# Altium PCB 110-00315-D_B1-DevKit.PcbDoc (part 4 of 9)
Units mil, origin at the board's own origin, x right, y up, seen from the top; angles counter-clockwise.
Board outline 5199.57 x 2702 mil, 8 copper layers (Top Layer, Layer 2-GND-Plane, Layer 3, Layer 4, Layer 5, Layer 6, Layer 7-PWR-Plane, Bottom Layer), stack 60.866 mil thick; 418 components, 298 nets, 1591 pads, 1631 vias.
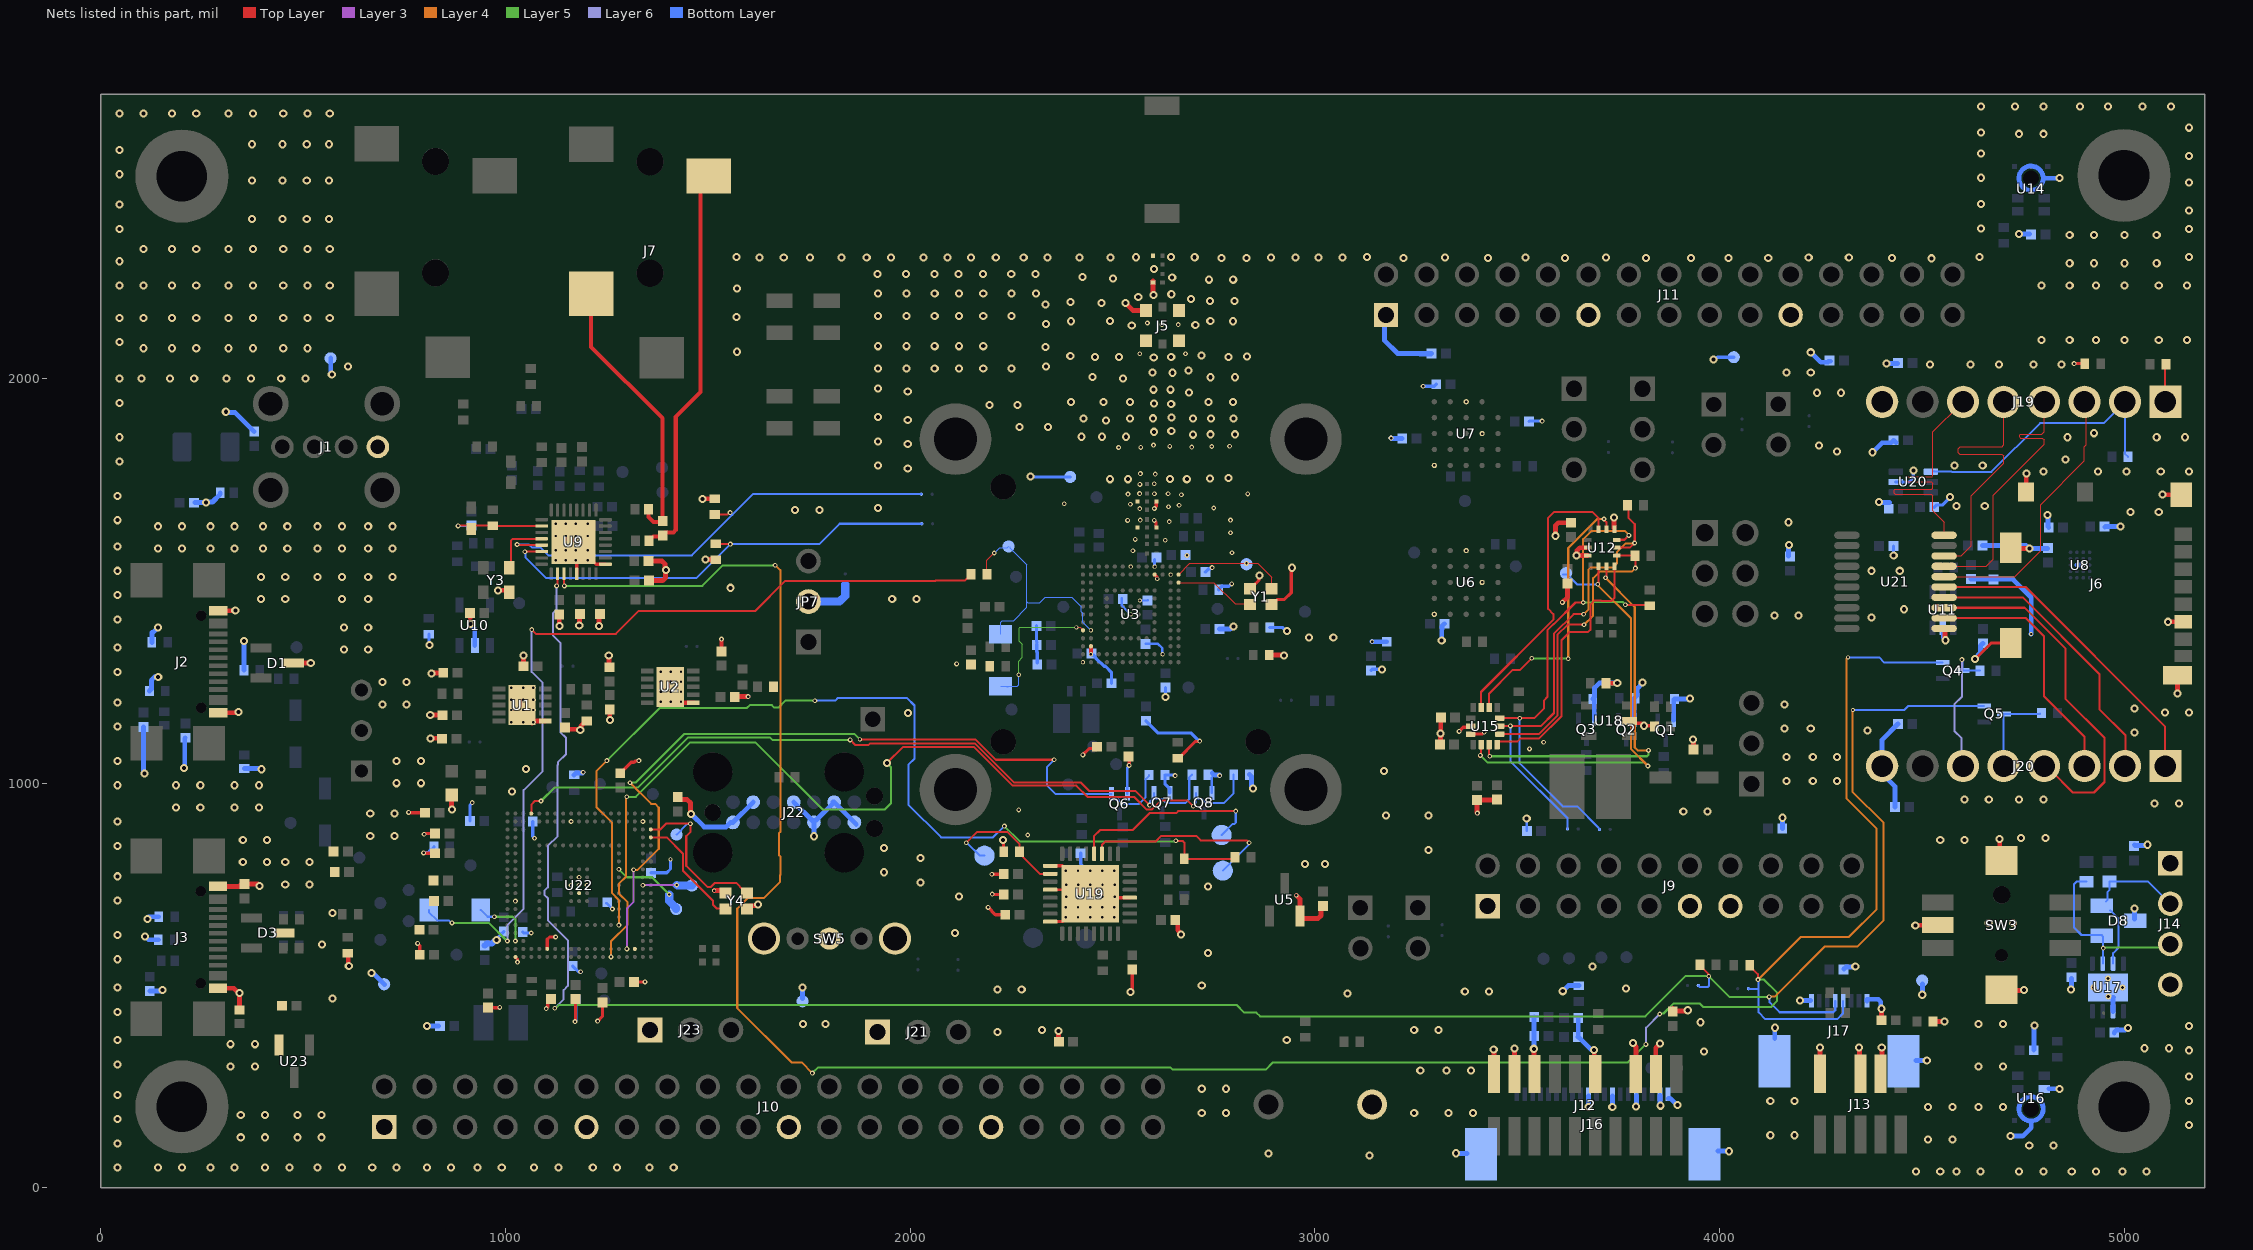
[diagram p9: the nets of this part, all layers, seen from the top]

## Via types
v1: diameter 20, hole 10, Top Layer to Bottom Layer, tented both sides, 773 vias
v2: diameter 12, hole 6, Top Layer to Bottom Layer, tented both sides, 549 vias
v3: diameter 12, hole 6, Top Layer to Bottom Layer, 194 vias
v4: diameter 10, hole 6, Top Layer to Bottom Layer, 101 vias
v5: diameter 10, hole 6, Top Layer to Bottom Layer, tented both sides, 10 vias
v6: diameter 15, hole 8, Top Layer to Bottom Layer, 4 vias

## Nets (pads, with @x,y where several pads share a name; then routed paths per layer and width w, separated by ;. In a path a pad name is that pad's centre, name@x,y a point inside that pad or via, vN(x,y) a via of type N, cw(c..) or ccw(c..) an arc to the next point about the centre after c; other vN are vias at no path point) (continued)
C_TXD_1: R68.1 R102.1 U22.E15 | length 2440.4
  Top Layer w5: v2@2658.58,858.8 2658.58,858.03 2659.81,856.8 2673.58,856.8 2677.26,853.11 R68.1@2677.26,812.8 2798.89,812.8 R102.1@2802.89,816.8
  Layer 5 w5: v2(1250.53,1055.8) 1380.53,1185.8 1596.53,1185.8 1603.53,1192.8 1658.27,1192.8 1664.27,1186.8 1674.53,1186.8 1691.53,1203.8 v2(1764.53,1203.8) ; v2(2232.58,893.8) 2270.58,855.8 2654.58,855.8 v2(2656.58,857.8)
  Layer 4 w5: v2(1250.53,1055.8) 1224.53,1029.8 1224.53,941.13 1262.53,903.13 1262.53,728.8 1280.15,711.18 v3(1280.15,649.3)
  Bottom Layer w5: v2(1764.53,1203.8) 1814.53,1203.8 1821.53,1210.8 1991.53,1210.8 2010.53,1191.8 2010.53,1060.8 1995.53,1045.8 1995.53,946.8 2076.53,865.8 2204.58,865.8 v2(2232.58,893.8)
CANH: D8.2 J14.2 R56.2 U17.7 | length 373.3
  Bottom Layer w5: D8.2@4955.58,707.8 4958.58,710.8 4958.58,730.8 4964,736.22 R56.2@4964,756.77 5059.23,756.77 5112.58,703.43 J14.2@5112.58,699.8 ; D8.2@4965.58,685.8 4966.11,685.8 4969.72,682.19 4969.72,681.65 4986.58,664.8 4986.58,593.8 4972.8,580.02 U17.7@4972.8,554
CANL: D8.1 J14.3 R57.2 U17.6 | length 456.6
  Layer 5 w5: v2(4948.22,592.44) 4949.56,593.78 5117.56,593.78 J14.3@5118.58,594.8
  Bottom Layer w5: R57.2@4907,756.55 4882.33,756.55 4876.58,750.8 4876.58,642.8 4894.58,624.8 D8.1@4945.58,624.8 ; D8.1@4946.58,621.8 4947.21,621.17 U17.6@4947.21,554
CK_ANA_A: J19.1 R75.2 | length 106.5
  Top Layer w5: R75.2@5101.58,2034.8 5101.58,1936.8 J19.1@5107.58,1930.8
CK_CS: J19.3 U21.16 | length 681.8
  Top Layer w3: U21.16@4555,1510.25 4730.04,1510.25 4793.58,1573.8 4793.58,1687.8 4902,1796.22 4902,1831.72 4906.77,1836.49 4906.77,1933.46 4902,1938.22 J19.3@4904.58,1940.8
CK_INT: J20.2 U21.14 | length 719
  Top Layer w5: U21.14@4555,1459.07 4749.3,1459.07 4938.58,1269.8 4938.58,1182.8 5003.58,1117.8 5003.58,1053.8 J20.2@5013.58,1043.8
CK_MISO: J19.5 U21.18 | length 678.2
  Top Layer w3: U21.18@4555,1561.44 4597.22,1561.44 4622.58,1586.8 4622.58,1710.8 4702,1790.22 4702,1808.8 4698,1812.8 4593.58,1812.8 4589.58,1816.8 4589.58,1826.8 4594.58,1831.8 4698.58,1831.8 4701.58,1834.8 ; J19.5@4701.58,1938.8 4702,1938.37 4702,1834.8
CK_MOSI: J19.6 U21.20 | length 677.9
  Top Layer w3: U21.20@4555,1612.62 4555,1645.37 4527.58,1672.8 4527.58,1709.8 4523.58,1713.8 4434.58,1713.8 4431.58,1716.8 4431.58,1723.8 4433.58,1725.8 4524.58,1725.8 4527.58,1728.8 4527.58,1740.8 4523.58,1744.8 4465.58,1744.8 4461.58,1748.8 4461.58,1754.8 4464.58,1757.8 4525.58,1757.8 4527.58,1759.8 4527.58,1867.83 4597.58,1937.83 J19.6@4597.58,1940.8
CK_PWM: J20.1 U21.15 | length 764.4
  Top Layer w5: U21.15@4555,1484.66 4756.71,1484.66 5101.58,1139.8 J20.1@5101.58,1064.8
CK_RST: J19.2 R72.2 U20.4 | length 683.5
  Bottom Layer w5: U20.4@4530,1771 4531,1770 4573.41,1770 4574.11,1769.3 4672.08,1769.3 4792.58,1889.8 4949.55,1889.8 J19.2@5000.56,1940.81 ; J19.2@4998.58,1942.8 J19.2@5000.56,1940.81 ; R72.2@5009.69,1806.25 5002,1813.94 5002,1939.37 J19.2@5000.56,1940.81
CK_RXD: J20.4 U21.13 | length 898.4
  Top Layer w5: U21.13@4555,1433.48 4753.89,1433.48 4855.58,1331.8 4855.58,1207.8 4951.53,1111.84 4951.53,1002.8 4925.53,976.8 4873.53,976.8 4817.53,1032.8 J20.4@4798.53,1032.8
CK_SCK: J19.4 U21.17 | length 678.1
  Top Layer w3: U21.17@4560.58,1533.8 4562.63,1535.84 4659.63,1535.84 4676.58,1552.8 4676.58,1711.8 4802,1837.22 4802,1848.8 4798,1852.8 4743.58,1852.8 ; 4743.34,1852.8 4741.58,1854.55 4741.58,1860.04 4743.34,1861.8 4796.58,1861.8 4801.58,1866.8 ; 4802,1866.8 J19.4@4802,1942.25
CK_SCL: J20.5 Q5.3 R74.2 | length 201.5
  Bottom Layer w5: J20.5@4704.58,1060.8 4702,1063.37 4702,1169.79 Q5.3@4703.15,1170.94 4791.72,1170.94 R74.2@4792.58,1171.8
CK_SDA: J20.6 Q4.3 R73.2 | length 337.2
  Layer 6 w5: v2(4599.22,1305.44) 4599.22,1213.44 4580.58,1194.8 4580.58,1128.8 4598.58,1110.8 4598.58,1064.8 J20.6@4605.58,1057.8
  Bottom Layer w5: v2@4599.58,1305.8 4600.58,1304.8 Q4.3@4600.58,1278.25 4643.44,1278.25 R73.2@4643.89,1277.8
CK_TXD: J20.3 U21.12 | length 620.5
  Top Layer w5: U21.12@4555,1407.89 4757.48,1407.89 4802,1363.37 4802,1214.32 4902,1114.32 4902,1053.32 J20.3@4904.53,1050.8
CLK_CODEC: U9.28 Y3.3 | length 145.3
  Top Layer w5: Y3.3@1006.58,1534.8 1013.58,1541.8 1013.58,1599.8 1017.66,1603.88 U9.28@1089.26,1603.88
CYP_SUSPEND: TP42.1 U19.11 | length 499.9
  Top Layer w5: U19.11@2474.11,825.3 2474.11,848.32 2481.58,855.8 2606.58,855.8 2620.58,869.8 2706.58,869.8 2717.58,858.8 2831.58,858.8 v2(2837.58,852.8)
  Bottom Layer w5: TP42.1@2772.58,783.8 2836.24,847.46 2836.24,854.46 v2@2836.58,854.8
CYP_WAKEUP: TP43.1 U19.12 | length 495.7
  Top Layer w5: U19.12@2454.42,825.3 2454.42,869.49 2469.13,884.2 2549.83,884.2 2591.43,925.8 2657.08,925.8 2662.08,930.8 v2(2804.53,930.8)
  Bottom Layer w5: TP43.1@2769.58,871.8 2797.24,899.46 2801.6,899.46 2804.53,902.39 v2(2804.53,930.8)
CYP_XRESn: R69.1 TP44.1 U19.18 | length 326.7
  Top Layer w5: v2(2138.58,852.8) 2164.58,878.8 2240.58,878.8 2270.26,849.11 R69.1@2270.26,830.8 ; R69.1@2271.58,823.8 2275.3,823.8 2278.59,820.5 2278.59,818 2320.58,776.01 U19.18@2346.08,776.01
  Bottom Layer w5: v2@2138.58,851.8 2141.47,851.8 2172.47,820.8 TP44.1@2183.58,820.8
GND: C1.2 C2.1 C3.1 C4.1 C5.1 C6.1 C7.1 C8.1 C9.1 C10.1 C11.1 C12.1 C13.1 C14.1 C17.1 C18.1 C19.1 C20.1 C21.1 C22.1 C23.2 C24.2 C25.1 C26.1 C27.1 C28.1 C29.1 C30.1 C31.1 C34.2 C39.1 C40.1 C41.2 C42.1 C43.1 C44.1 C45.1 C46.1 C47.1 C48.1 C49.1 C50.1 C51.1 C52.2 C53.1 C54.1 C55.1 C60.1 C61.1 C62.1 C67.1 C68.1 C75.1 C77.1 C78.1 C79.1 C80.1 C81.1 C82.1 C83.1 C84.2 C85.1 C86.2 C87.2 C88.2 C89.2 C90.2 C91.2 C92.2 C93.1 C94.2 C95.1 C96.2 C97.2 C98.2 C99.1 C100.1 C101.2 C102.2 C103.2 C104.1 C105.1 C106.1 C107.1 C108.1 C109.1 C110.1 C111.1 C112.2 C113.1 C114.1 C115.1 C116.1 C117.1 C118.2 C119.1 C120.1 C121.1 C122.1 C123.1 C124.1 C125.1 C126.1 C127.1 C128.1 C129.2 C130.2 C131.1 C132.1 C133.1 C134.1 C135.1 C136.1 C137.1 C138.1 C139.1 C140.1 C141.1 C142.1 C143.1 C144.1 D1.3 D3.3 D6.K D8.3 FB1.2 FB3.1 FB5.1 J1.4 J2.A1/B12 J2.B1/A12 J3.A1/B12 J3.B1/A12 J5.G1 J5.G2 J5.G3 J5.G4 J6.6 J6.10 J6.G1 J6.G2 J6.G3 J6.G4 J9.1 J9.11 J9.13 J10.1 J10.11 J10.21 J10.31 J11.1 J11.11 J11.21 J12.3 J12.5 J12.9 J12.15 J12.17 J12.19 J13.3 J13.5 J13.9 J14.1 J14.4 J16.10 J16.13 J16.16 J16.19 J16.20 J16.21 J16.22 J17.1 J17.8 J17.9 J17.10 J19.8 J20.8 J21.1 J22.2 J22.4 J22.6 J22.8 J22.10 J22.14 J23.1 JP7.2 PD1.1 PD2.1 Q1.2 Q2.2 Q3.2 Q6.2 Q7.2 Q8.2 R2.1 R4.1 R11.1 R13.1 R15.1 R18.2 R19.2 R20.2 R21.2 R24.1 R26.2 R27.1 R28.2 R29.1 R59.1 R60.1 R61.1 R64.2 R69.2 R76.2 R79.1 R81.1 R82.1 R89.2 R90.1 R91.1 R95.1 R97.1 R98.1 S6.2 SH7.2 SW2.2 SW3.5 SW3.SH1 SW3.SH2 SW5.2 SW5.4 SW5.5 TP6.1 TP7.1 TP8.1 TP9.1 TP10.1 TP11.1 U1.6 U1.11 U2.6 U2.11 U3.B2 U3.C12 U3.D1 U3.D2 U3.G1 U3.G7 U3.M11 U3.M12 U3.N13 U5.2 U6.B3 U6.C1 U6.E5 U7.B3 U7.C1 U7.E5 U8.C2 U8.C3 U9.5 U9.9 U9.33 U10.2 U11.2 U12.1 U12.6 U12.7 U14.3 U15.6 U15.7 U16.2 U16.3 U17.2 U17.9 U18.2 U19.4 U19.17 U19.20 U19.24 U19.33 U20.2 U21.11 U22.B2 U22.C18 U22.J10 U22.K9 U22.K10 U22.K11 U22.L2 U22.L10 U22.P18 U22.V12 U22.V19 U23.2 Y1.2 Y1.4 Y3.2 Y4.2 Y4.4 | length 10195.3
  Top Layer w6: U19.20@2346.08,736.64 U19.33@2434.74,736.64
  Top Layer w8: v3(760.53,927.8) 761.53,926.8 C127.1@800.82,926.8 ; v3(782.53,603.8) 787.82,598.51 C138.1@787.82,575.8 ; v3(797.53,827.8) 798.53,826.8 C122.1@825.82,826.8 ; v3(798.53,873.8) 800.53,875.8 C128.1@825.82,875.8 ; C141.1@956.53,445.08 984.82,445.08 v3(985.53,445.8) ; U22.V19@1024.24,570.56 1024.24,570.06 1029.53,564.77 v3(1029.53,557.8) ; v3(1100.53,442.8) 1102.53,444.8 1102.53,445.8 1104.37,447.64 1104.37,458.67 C123.1@1112.58,466.87 ; U22.P18@1102.98,590.24 1102.98,614.2 1108.58,619.8 v3(1123.53,619.8) ; v3(1171.53,410.8) 1172.53,411.8 C121.1@1172.53,466.08 ; v3(1173.58,1550.8) 1175.88,1548.5 U9.5@1175.88,1517.26 ; U9.33@1218.58,1545.8 1223.49,1540.88 U9.9@1246.74,1540.88 ; v3(1227.53,411.8) 1239.53,423.8 C136.1@1239.53,458.08 ; C130.2@1283.53,1024.51 1310.82,1051.8 1317.53,1051.8 1320.53,1054.8 1328.53,1054.8 v3(1329.53,1055.8) ; C126.1@1317.25,508.8 v3(1344.53,508.8) ; v1(1994.58,1173.8) v1@1994.89,1174.11 ; v2(2192.58,692.8) 2210.58,674.8 C109.1@2234.86,674.8 ; v2@2200.58,773.8 v2(2201.78,775) C105.1@2231.29,775 ; v2(2202.58,725.8) 2203.37,725 C104.1@2231.29,725 ; v1(2229.58,859.8) 2230.24,859.14 2230.24,831.45 R69.2@2230.89,830.8 ; U19.24@2346.08,657.9 2375.68,657.9 U19.33@2379.58,661.8 ; U19.17@2346.08,795.69 2375.68,795.69 2434.74,736.64 U19.33@2444.58,726.8 ; v2(2426.58,1069.8) 2442.34,1085.56 2461.61,1085.56 C20.1@2465.85,1089.8 ; U19.33@2508.58,716.8 2508.74,716.95 U19.4@2543.08,716.95 ; C27.1@2539.58,1065.8 2541.08,1064.3 v2(2541.08,1043.8) ; v1(2544.58,483.8) 2548.58,487.8 C108.1@2548.58,539.36 ; v2(2603,1649.2) 2603,1648.12 2607.61,1643.51 2607.61,1632.4 C39.1@2608.61,1631.4 ; v2(2603.4,1678.8) 2603.4,1679.88 2607.81,1684.29 2607.81,1695.41 C40.1@2608.5,1696.1 ; U3.D2@2604,1515.48 2604,1514.81 2610.15,1508.66 2610.15,1505.18 v4(2610.53,1504.8) ; R28.2@2663.73,1061.8 2704.96,1103.03 2714.77,1103.03 v2(2715.53,1103.8) ; Y1.4@2841.53,1487.8 2848.26,1487.8 2861.24,1500.78 2861.24,1511 v1(2863.53,1513.3) ; Y1.2@2893.11,1441.11 2894.09,1441.11 2906.78,1453.8 2924.53,1453.8 2941.43,1470.69 2941.43,1528.9 v1@2940.53,1529.8 ; v2(3356.58,1127.8) 3366.89,1138.11 3382.09,1138.11 U15.6@3384.98,1141 ; U15.7@3384.98,1121.32 3414.1,1121.32 ; U18.2@3777.25,1154 3783.25,1148 3807.37,1148 v1(3813.58,1141.8) ; v1@3808.58,1139.8 3810.58,1141.8 v1(3813.58,1141.8) ; R60.1@3839.63,1140 3837.84,1141.8 v1(3813.58,1141.8) ; v1(4631.58,1306.8) 4671.19,1346.4 J6.G3@4719.39,1346.4 ; v3(4876.53,2036.8) R76.2@4902.85,2036.8
  Top Layer w10: C10.1@1533.58,1325.8 v2(1533.58,1355.8) ; v4(2446.52,1318.63) U3.M11@2446.52,1338.32
  Top Layer w12: J3.B1/A12@289.33,493.02 328.7,493.02 341.53,480.18 v1@341.53,479.8 ; J3.A1/B12@289.33,744.99 341.72,744.99 C13.1@347.53,750.8 ; J2.B1/A12@290.03,1174.02 335.59,1174.02 336.53,1174.96 v1@336.53,1177.8 ; J2.A1/B12@290.03,1425.99 290.19,1426.15 331.87,1426.15 v1(332.03,1426.3) ; FB5.1@342.53,439.5 v1@342.53,481.8 ; C13.1@354.53,750.51 v1@387.82,750.51 ; D1.3@475.53,1296.8 516.53,1296.8 v1@519.53,1299.8 ; v1(612.53,547.8) 611.27,549.06 611.27,576.49 R89.2@612.58,577.8 ; v1@814.41,1168.8 C3.1@840.58,1168.8 ; v1@815.41,1110.8 C6.1@841.58,1110.8 ; v1@817.41,1271.8 C75.1@843.58,1271.8 ; v1@866.58,935.63 D6.K@866.58,961.8 ; v1@912.58,1393.63 C55.1@912.58,1419.8 ; v1@981.41,1476.8 Y3.2@1007.58,1476.8 ; C4.1@1044.58,1288.8 v1@1044.58,1314.96 ; U1.11@1065.58,1148.8 1070.32,1153.54 1098,1153.54 U1.6@1098.09,1153.63 ; v1@1132.58,1388.63 C61.1@1132.58,1414.8 ; C5.1@1145.58,1134.8 1147.05,1133.33 1183,1133.33 v1(1184.53,1131.8) 1186.06,1133.33 1186.06,1140.66 1199.04,1153.63 R2.1@1201,1153.63 ; C60.1@1181.58,1419.8 1182.85,1418.53 1182.85,1390.03 v1(1182.12,1389.3) ; v1@1230.58,1388.63 C62.1@1230.58,1414.8 ; C9.1@1255.58,1288.8 v1@1255.58,1314.96 ; v1@1257.58,1156.63 C12.1@1257.58,1182.8 ; C68.1@1353.3,1548.8 1386.55,1548.8 1393.58,1541.77 1393.58,1531.96 1395.05,1530.49 1395.05,1528.27 v1@1393.58,1526.8 ; C67.1@1354.3,1500.8 1388.55,1500.8 1395.58,1507.83 v1@1395.58,1526.8 ; C129.2@1425.53,965.51 1431.74,959.31 1449.02,959.31 1457,951.33 1457,927.33 v1@1459.53,924.8 ; U2.11@1433.53,1197.8 1434.37,1198.63 U2.6@1464.09,1198.63 ; v1@1487.41,1702.8 R81.1@1513.58,1702.8 ; v1@1494.41,1552.8 R82.1@1520.58,1552.8 ; v4(1515.53,734.3) 1537.14,734.3 Y4.4@1542.96,728.48 ; C11.1@1566.25,1212.8 1567.25,1213.8 v2(1599.53,1213.8) ; Y4.2@1596.11,689.11 1603.89,696.89 1617.54,696.89 1621.24,700.59 v1(1623.4,700.59) ; C80.1@2366.58,360.8 v1@2366.58,386.96 ; U19.33@2444.58,726.8 2497.51,726.8 v3(2505.26,719.05) ; v1(2532.27,2186.13) 2532.48,2186.13 2550.41,2168.2 J5.G4@2583.18,2168.2 ; C41.2@2599.72,2240.8 2599.72,2234.54 2599.97,2234.3 2599.97,2208.13 v1(2601.5,2206.6) ; C107.1@2656.58,663.8 2661.21,659.17 2661.21,636.28 2669.53,627.96 v1(2669.53,625.8) ; R29.1@2887.26,1316.8 2887.76,1316.3 2925.03,1316.3 v1@2926.53,1317.8 ; v4(2954.53,722.8) 2962.93,714.4 U5.2@2962.93,671.8 ; U5.2@2962.53,665.8 3008.3,665.8 3015.33,672.83 3015.33,691.59 C43.1@3020.53,696.8 ; C90.2@3310.58,1095.8 v1@3310.58,1121.96 ; C91.2@3311.29,1162 3311.29,1119.09 v1@3312.58,1117.8 ; v2(3401.53,925.8) 3400.53,926.8 C100.1@3400.53,958.08 3401.17,958.72 3449.89,958.72 C101.2@3450.53,959.36 ; J12.19@3442.58,314.8 v1@3442.58,340.96 ; J12.17@3493.58,317.8 v1@3493.58,343.96 ; J12.15@3541.58,316.8 v1@3541.58,342.96 ; v1(3594.58,1611.3) 3594.58,1636.48 3601.61,1643.51 C84.2@3632.58,1643.51 ; v2(3611.58,1446.8) 3624.58,1459.8 C85.1@3624.58,1493.8 ; v1@3645.58,1566.8 3647.58,1568.8 3647.58,1574.77 3654.61,1581.8 U12.6@3674.65,1581.8 ; v1@3647.41,1562.8 U12.7@3673.58,1562.8 ; J12.9@3690.58,313.8 v1@3690.58,339.96 ; R59.1@3720.58,1246.8 v1@3746.74,1246.8 ; U12.1@3739.58,1629.8 v1@3739.58,1655.96 ; v1(3786.58,357.8) 3786.58,355.63 3793.58,348.63 J12.5@3793.58,320.8 ; J12.3@3842.58,321.8 3842.58,346.07 3852.58,356.07 v1(3852.58,356.8) ; C87.2@3884.58,442.8 3890.11,437.27 3920.05,437.27 v1(3921.58,438.8) ; C97.2@3935.82,1082.8 v1@3935.82,1107.51 ; J13.9@4248.58,319.8 v1@4248.58,345.96 ; J13.5@4345.58,319.8 v1@4345.58,345.96 ; C88.2@4400.58,415.8 v1@4400.58,441.96 ; J13.3@4401.58,319.8 v1@4401.58,345.96 ; v1@4484.41,648.8 SW3.5@4510.58,648.8 ; R64.2@4529.58,410.8 v1@4555.74,410.8 ; v1@4557.58,1353.63 U21.11@4557.58,1379.8 ; SW3.SH2@4692.58,834.8 v1@4692.58,860.96 ; J6.G4@4719.39,1581.44 4720.61,1580.23 v1(4766.24,1580.23) ; SW3.SH1@4725.58,487.8 v1@4751.74,487.8 ; J6.10@4758.27,1720.34 v1(4758.27,1765.01) ; v1(5095.03,1712.84) J6.G1@5139.55,1712.84 ; v1(5108.58,1398.8) 5108.66,1398.88 5143.73,1398.88 J6.6@5143.82,1398.8 ; v1(5131.58,1221.8) 5131.58,1266.47 J6.G2@5131.79,1266.68
  Bottom Layer w6: C131.1@1249.11,703.61 v3@1263.58,689.14 ; C26.1@2522.72,1456.8 2522.72,1439.29 v4(2544.95,1417.06) ; Q6.2@2536.69,973.58 2536.69,1037.78 2541.08,1042.17 v2(2541.08,1043.8) ; v4(2567.58,1451.3) 2586.36,1451.3 C22.1@2586.58,1451.51 ; C25.1@2581.58,1344.08 2612.3,1344.08 2622.74,1333.63 2622.74,1319.58 v4(2623.69,1318.63) ; R97.1@2744.58,1013.8 2745.69,1012.69 Q8.2@2745.69,975.58 ; v1(3523.58,912.3) 3523.58,882.08 C77.1@3523.86,881.8
  Bottom Layer w8: v3(797.53,827.8) 798.3,828.56 808.61,828.56 814.05,834 816.02,834 822.85,840.83 R90.1@822.85,842.8 ; S6.2@810.53,1368.11 810.53,1342.8 v1(811.53,1341.8) ; C134.1@911.82,906.8 911.82,945 917.53,950.71 v2(917.53,951.8) ; v1@979.53,611.8 980.42,612.68 980.42,617.97 C125.1@995.53,633.08 ; C119.1@1042.58,632.08 1045.08,629.58 v3(1063.58,629.58) ; C133.1@1067.25,904.8 1067.25,868.08 v3(1071.53,863.8) ; C137.1@1166,548 1180.21,533.8 v3(1185.53,533.8) ; v3@1172.53,411.8 1172.3,412.03 1172.3,412.64 1173.53,413.88 C135.1@1173.53,465.08 ; C132.1@1359.53,778.36 1398.1,778.36 1407.53,787.8 v5(1407.53,811.8) ; v1(2297.2,1758) 2298.4,1756.8 TP8.1@2395.3,1756.8 ; C28.1@2311.86,1388.8 2311.86,1348.51 C21.1@2313.58,1346.8 ; 2312.86,1324.08 C21.1@2312.86,1341.8 ; C34.2@2313.86,1297.8 2313.86,1324.08 ; C106.1@2421.3,826.8 2421.3,799.97 2426.95,794.31 2432.98,794.31 2443.5,783.8 v3(2444.58,783.8) ; C17.1@2452.58,1315.8 2453.3,1315.8 2459,1310.09 2459,1308.86 2479.07,1288.8 2482.58,1288.8 2497.3,1274.08 C19.1@2497.3,1246.8 ; v4@2544.57,1535.55 v4(2544.95,1535.17) ; C31.1@2582.53,1154.08 2612.82,1123.8 2694.53,1123.8 v2@2713.53,1104.8 ; v4(2604,1535.17) C86.2@2604,1553 ; v1(2630.58,1212.8) C30.1@2630.58,1236.08 ; Q7.2@2641.69,975.58 2641.69,986.53 2629.58,998.64 2629.58,1019.89 R95.1@2629.69,1020 2653.37,1020 v2(2654.58,1018.8) ; C23.2@2729.32,1521.6 2737.52,1529.8 2742.22,1529.8 2744.92,1532.5 v2(2746,1532.5) ; R79.1@2762.68,1477.6 2762.68,1479.57 2769.51,1486.4 2787.79,1486.4 2793,1491.6 v2@2794.8,1491.6 ; v1@2862.45,1514.38 v1(2863.53,1513.3) ; R27.1@2888.26,1384.8 2919.33,1384.8 2929.33,1374.8 v1@2932.58,1374.8 ; C46.1@3138.58,1278.08 3141.8,1281.3 v1(3165.58,1281.3) ; v3(3267.53,1980.8) 3294.82,1980.8 C45.1@3299.89,1985.88 ; C48.1@3529.33,1893.88 3530.33,1894.88 v3(3561.61,1894.88) ; v1(3985.53,2046.8) 3988.78,2046.8 3994.78,2052.8 TP6.1@4035.53,2052.8 ; C117.1@4429.72,1586.25 4429.72,1563.66 v1(4430.58,1562.8) ; U20.2@4435.7,1744.25 4469.25,1744.25 4479,1754 v1@4479,1776 ; C112.2@4530.72,1682 4535.95,1687.24 4550.23,1687.24 v1(4570,1707)
  Bottom Layer w10: v3(1181.69,747.69) v3@1181.69,748.23
  Bottom Layer w12: v1@105.53,1026.8 C7.1@105.53,1139.08 ; 117.53,612.8 R21.2@141.85,612.8 ; v1@117.53,669.8 R20.2@142.85,669.8 ; R19.2@119.85,1227.8 124.67,1232.62 124.67,1253.94 v1@134.53,1263.8 ; C14.1@120.53,486.08 v1@147.82,486.08 ; R18.2@125.85,1347.8 125.85,1372.11 127.85,1372.11 v1@143.53,1387.8 ; v1@208.53,1036.8 207.03,1038.3 207.03,1110.58 C8.1@208.53,1112.08 ; C1.2@232.58,1693.8 v1@258.74,1693.8 ; v1@261.53,1693.8 262.52,1694.78 275.63,1694.78 294.85,1714 FB1.2@294.85,1717.8 ; v1@308.53,1915.8 331.93,1915.8 C2.1@379,1868.72 ; R26.2@353.32,1279 353.43,1279.11 353.43,1350.69 v1(353.53,1350.8) ; FB3.1@354.53,1036.1 v1@395.26,1036.06 ; TP10.1@567.8,2050.8 567.8,2014.69 570.53,2011.96 v1(570.53,2009.8) ; v1(668.58,530.8) 670.11,529.27 674.11,529.27 TP11.1@700.58,502.8 ; v1(805.53,399.8) C79.1@834.24,399.8 ; v1@910.58,1391.8 912.25,1391.8 923.96,1380.08 U10.2@923.96,1339.77 ; R91.1@1169.53,1020.48 1174.36,1025.31 1190.04,1025.31 v2(1191.53,1026.8) ; v1@1457.53,924.8 v1(1458.53,923.8) 1490.53,891.8 1544.85,891.8 1556.05,903 J22.14@1562,903 J22.2@1612,953 ; J22.4@1712,953 1757.21,907.8 J22.10@1766.53,907.8 ; TP9.1@1733.58,467.8 v1@1733.58,493.96 ; JP7.2@1747.53,1450.8 JP7.2@1749.53,1448.8 ; J22.10@1762,903 1762.27,902.74 1762.27,869.06 v1(1762.53,868.8) ; J22.10@1766.67,907.66 1809.53,950.53 J22.6@1809.53,953 ; J22.6@1812,953 J22.8@1862,903 1866.53,898.47 J22.8@1866.53,897.8 ; 2746.58,1024.8 2751.48,1019.9 v2@2764.58,1019.9 ; C18.1@2764.53,1380.8 2790.37,1380.8 2795.37,1385.8 v1@2797.53,1385.8 ; R98.1@2838.69,1021 2843.52,1016.18 2843.52,992.98 2847.53,988.96 v1(2847.53,986.8) ; v4(3141.53,1349.8) 3141.82,1349.51 C44.1@3177.58,1349.51 ; J11.1@3172.53,2162.8 3172.53,2093.8 3204.53,2061.8 C81.1@3288.53,2061.8 ; v2(3188.53,1852.8) 3189.45,1851.88 C49.1@3215.89,1851.88 ; 3259.53,2060.8 C81.1@3287.58,2060.8 ; v1(3313.53,1352.8) 3313.53,1380.56 3314.04,1381.07 3314.04,1387.59 C47.1@3320.25,1393.8 ; v1@3349.41,84.8 J16.22@3375.58,84.8 ; C99.1@3542.29,422 3541.66,421.38 3541.66,345.71 v1@3542.58,344.8 ; v1(3612.58,485.8) 3626.26,499.48 R61.1@3652.58,499.48 ; C98.2@3650.72,373 3681.69,342.04 3686.34,342.04 3689.58,338.8 v1@3689.58,337.8 ; C98.2@3650.86,378.51 3650.86,419.86 C96.2@3651,420 ; v1@3676.58,200.63 J16.10@3676.58,226.8 ; R15.1@3686.69,1208 3691.52,1212.83 3691.52,1235.73 3703.12,1247.34 v1(3747.29,1247.34) 3749.04,1247.34 v1@3750.58,1245.8 ; R15.1@3690.59,1207.78 3690.59,1157.67 Q3.2@3690.69,1157.58 ; v1@3735.58,200.63 J16.13@3735.58,226.8 ; Q2.2@3789.37,1156 3789.37,1210 3789.72,1210 3796.52,1216.8 3796.52,1233.57 3809.58,1246.63 v1(3809.58,1248.8) ; v1@3794.58,201.63 J16.16@3794.58,227.8 ; J16.19@3853.28,227.8 3853.28,203.6 v1(3854.08,202.8) ; J16.20@3873.58,220.8 3878.41,220.8 3894.41,204.8 v1(3896.58,204.8) ; Q1.2@3886.69,1155.58 3886.78,1155.67 R11.1@3886.78,1207 ; R11.1@3888.69,1208 3926.78,1208 v1(3927.58,1208.8) ; J16.21@3996.58,90.8 v1@4022.74,90.8 ; J17.10@4136.58,368.8 v1@4136.58,394.96 ; C78.1@4155.58,887.8 v1@4155.58,913.96 ; C110.1@4170.74,1561.63 v1@4170.74,1587.8 ; v1@4199.41,462.8 J17.1@4225.58,462.8 ; v1(4225.53,2064.8) 4250.15,2040.18 C82.1@4267.88,2040.18 ; C82.1@4269.82,2042.8 C82.1@4274.58,2042.8 ; C103.2@4307.58,540.8 4311.99,545.21 4331.82,545.21 4333.41,546.8 v1(4335.58,546.8) ; J17.8@4364.8,462 4364.8,465.8 4392.55,465.8 4398.51,459.84 4398.51,445.87 v1@4399.58,444.8 ; v1(4378.53,1817.8) 4401.78,1841.05 4424.08,1841.05 C114.1@4430.29,1847.25 C114.1@4436.49,1841.05 ; v1@4394.41,1693.8 4420.58,1693.8 ; J20.8@4411.58,1054.8 4402,1064.37 4402,1107.25 C115.1@4441,1146.25 ; J20.8@4412.58,1038.8 4412.58,1013.35 4433.58,992.35 C116.1@4433.58,940.8 ; v1@4413.41,2036.8 C113.1@4439.58,2036.8 ; J17.9@4485.58,314.8 v1@4511.74,314.8 ; v1@4501.58,477.63 TP7.1@4501.58,503.8 ; U11.2@4552,1383.75 4554,1381.75 4554,1359.37 4558.12,1355.25 v1(4558.12,1353.09) ; C53.1@4621.53,1504.08 4725.25,1504.08 4770.53,1458.8 4770.53,1368.97 v4(4770.1,1368.54) ; v1(4631.58,1306.8) 4631.58,1308.96 4644.8,1322.18 4644.8,1339.08 C83.1@4651,1345.29 ; C118.2@4649.72,1587.25 4757.04,1587.25 4764.07,1580.23 v1(4766.24,1580.23) C54.1@4810.91,1580.23 ; v1(4719.58,127.8) 4749.41,127.8 4770.41,148.8 4770.41,165 U16.3@4770.41,165.47 ; v1@4740.41,2356.8 C89.2@4766.58,2356.8 ; C92.2@4776.58,340.8 4777.65,341.87 4777.65,399.87 v1(4778.58,400.8) ; 4800,2495 4838.33,2495 v1@4838.53,2494.8 ; v1@4810.22,1663.16 v1(4810.58,1662.8) v1@4811.72,1661.66 ; v1@4810.53,1663.8 4812.11,1662.22 4812.11,1633.5 C52.2@4813.82,1631.8 ; U16.2@4813.58,244.8 v1@4839.74,244.8 ; v1@4869.58,490.63 C93.1@4869.58,516.8 ; U8.C3@4883.26,1539 v2(4899,1539) ; C51.1@4952.21,1632.9 4953.21,1633.9 4990.48,1633.9 v1(4990.58,1633.8) ; U17.2@4972.8,436 4972.8,470.02 U17.9@4973.58,470.8 ; C94.2@4975.58,381.8 4975.58,383.86 C94.2@4975.72,384 4981.93,390.21 5002.78,390.21 5007.37,394.8 v1(5009.53,394.8) ; D8.3@5025.58,663.8 v1@5025.58,689.96 ; C95.1@5025.58,847.8 5027.11,846.27 5056.05,846.27 v1(5057.58,847.8)
  Bottom Layer w15: C124.1@948.58,598.51 953.28,603.22 966,603.22 v1@973.58,610.8
  Bottom Layer w20: JP7.2@1749.53,1448.8 1825.53,1448.8 1839.53,1462.8 SH7.2@1839.53,1490.5
  other v1: 4485.53,39.8 4545.53,39.8 4585.53,39.8 4645.53,39.8 4740.53,39.8 4800.53,39.8 4870.53,39.8 4930.53,39.8 4995.53,39.8 5055.53,39.8 40.53,49.8 140.53,49.8 200.53,49.8 270.53,49.8 330.53,49.8 405.53,49.8 465.53,49.8 535.53,49.8 595.53,49.8 670.53,49.8 730.53,49.8 805.53,49.8 865.53,49.8 930.53,49.8 990.53,49.8 1070.53,49.8 1130.53,49.8 1215.53,49.8 1275.53,49.8 1355.53,49.8 1415.53,49.8 3135.53,79.8 2885.53,84.8 3348.87,85.34 4023.29,90.25 4765.53,104.8 4825.53,104.8 40.53,109.8 4515.53,119.8 4575.53,119.8 345.53,124.8 405.53,124.8 485.53,124.8 545.53,124.8 4125.53,129.8 4185.53,129.8 5160.53,154.8 40.53,169.8 345.53,179.8 405.53,179.8 485.53,179.8 545.53,179.8 2720.53,184.8 2780.53,184.8 3245.53,184.8 3330.53,184.8 3390.53,184.8 3676.04,200.09 3735.04,200.09 4515.53,199.8 4575.53,199.8 4640.53,199.8 4700.53,199.8 3794.04,201.09 4125.53,214.8 4185.53,214.8 5160.53,214.8 40.53,229.8 4840.29,244.25 2720.53,244.8 2780.53,244.8 5160.53,274.8 3260.53,289.8 3325.53,289.8 3385.53,289.8 320.53,299.8 380.53,299.8 4640.53,299.8 4700.53,299.8 40.53,304.8 4512.29,314.25 3962.1,337.14 5160.53,339.8 3690.04,340.51 3442.04,341.51 3541.04,343.51 3493.04,344.51 5050.53,344.8 5110.53,344.8 4248.04,346.51 4345.04,346.51 4401.04,346.51 320.53,354.8 380.53,354.8 40.53,364.8 2930.53,364.8 2215.53,384.8 2366.04,387.51 2325.53,389.8 3245.53,389.8 3305.53,389.8 4137.12,395.51 5160.53,399.8 1735.53,404.8 1790.53,404.8 4640.53,404.8 4700.53,404.8 3953.1,409.14 4556.29,411.34 40.53,434.8 4400.04,442.51 4198.87,463.34 572.53,467.8 4501.04,477.09 3080.53,479.8 342.57,481.31 3370.53,484.8 3430.53,484.8 152.57,488.31 4752.29,488.34 2215.53,489.8 2275.53,489.8 4869.04,490.09 3768.9,492.14 40.53,494.8 1734.12,494.51 2720.53,499.8 3685.9,547.14 40.53,564.8 2735.53,579.8 546.53,600.8 978.12,612.09 108.57,621.31 40.53,624.8 2110.53,629.8 4483.87,648.25 4665.53,654.8 4725.53,654.8 114.57,664.31 571.83,678.78 5026.12,690.51 40.53,709.8 2120.53,719.8 2735.53,744.8 391.57,746.31 455.53,749.8 515.53,749.8 2025.53,754.8 40.53,769.8 1935.53,779.8 2975.53,799.8 3025.53,799.8 350.53,804.8 410.53,804.8 455.53,804.8 515.53,804.8 2025.53,814.8 3280.53,834.8 1935.53,839.8 40.53,844.8 350.53,859.8 410.53,859.8 4545.53,859.8 4605.53,859.8 4692.04,861.51 4745.53,864.8 4805.53,864.8 665.53,869.8 725.53,869.8 40.53,904.8 4156.12,914.51 3175.53,919.8 3280.53,919.8 665.53,924.8 725.53,924.8 3910.53,929.8 3970.53,929.8 867.12,935.09 185.53,939.8 245.53,939.8 330.53,939.8 390.53,939.8 5075.53,949.8 5135.53,949.8 4605.53,959.8 4665.53,959.8 4740.53,959.8 4800.53,959.8 1015.53,979.8 40.53,994.8 185.53,994.8 245.53,994.8 330.53,994.8 390.53,994.8 730.53,999.8 790.53,999.8 4165.53,1004.8 4230.53,1004.8 4290.53,1004.8 107.57,1024.31 3170.53,1029.8 396.57,1034.31 1050.53,1034.8 205.53,1037.8 40.53,1054.8 730.53,1054.8 790.53,1054.8 4165.53,1064.8 4230.53,1064.8 4290.53,1064.8 3934.57,1108.31 814.87,1110.25 3310.04,1122.51 5025.53,1124.8 4365.53,1129.8 4160.53,1134.8 4225.53,1134.8 40.53,1139.8 1258.12,1156.09 813.87,1168.25 5100.53,1174.8 5160.53,1174.8 339.53,1175.8 5025.53,1184.8 695.53,1194.8 755.53,1194.8 4160.53,1194.8 40.53,1199.8 695.53,1249.8 755.53,1249.8 141.57,1262.31 816.87,1271.25 40.53,1274.8 518.57,1297.31 1044.04,1315.51 1255.04,1315.51 2923.53,1315.8 600.53,1329.8 660.53,1329.8 40.53,1334.8 2985.53,1359.8 3045.53,1359.8 2931.58,1375.8 140.57,1384.31 600.53,1384.8 660.53,1384.8 2798.53,1386.8 1133.12,1388.09 1231.12,1388.09 913.12,1393.09 40.53,1404.8 4375.53,1409.8 4135.53,1414.8 4195.53,1414.8 4455.53,1429.8 395.53,1454.8 455.53,1454.8 595.53,1454.8 660.53,1454.8 1955.53,1454.8 2015.53,1454.8 40.53,1464.8 980.87,1476.25 1555.58,1482.8 395.53,1509.8 455.53,1509.8 535.53,1509.8 595.53,1509.8 660.53,1509.8 720.53,1509.8 40.53,1524.8 4375.53,1524.8 4445.53,1524.8 1396.58,1526.8 2943.72,1532.3 1493.87,1552.25 3646.87,1562.25 140.53,1579.8 200.53,1579.8 270.53,1579.8 330.53,1579.8 400.53,1579.8 460.53,1579.8 535.53,1579.8 595.53,1579.8 660.53,1579.8 720.53,1579.8 40.53,1584.8 4171.29,1588.34 140.53,1634.8 200.53,1634.8 270.53,1634.8 330.53,1634.8 400.53,1634.8 460.53,1634.8 535.53,1634.8 595.53,1634.8 660.53,1634.8 720.53,1634.8 4170.53,1644.8 40.53,1649.8 3739.04,1656.51 5015.53,1669.8 5085.53,1669.8 1715.53,1674.8 1775.53,1674.8 1920.53,1679.8 4585.53,1684.8 4655.53,1684.8 259.29,1693.25 4393.87,1694.34 1486.87,1702.25 40.53,1709.8 2493.5,1751.1 2538.5,1751.1 2683.5,1751.1 2642,1752 2740.53,1752.8 2786.53,1753.8 4800.53,1769.8 4935.53,1769.8 5005.53,1769.8 5090.53,1769.8 5160.53,1769.8 4479.52,1772.6 1993.95,1777.87 1920.53,1784.8 4580.53,1784.8 4650.53,1784.8 45.53,1794.8 4855.53,1799.8 4290.53,1819.8 4245.53,1834.8 1993.95,1837.87 1920.53,1844.8 45.53,1854.8 4860.53,1854.8 5080.53,1854.8 5150.53,1854.8 2423.5,1856.1 2473.5,1856.1 2533.5,1856.1 2698.5,1861.1 2742.27,1862.13 2802.27,1862.13 4925.53,1864.8 2602.3,1868.3 2645.2,1870.2 2270.53,1879.8 2340.53,1879.8 2483.5,1896.1 1993.95,1897.87 2428.5,1901.1 2543.5,1901.1 2698.5,1901.1 2743.5,1901.1 2798.5,1901.1 2600.5,1901.7 2645.8,1904 1920.53,1904.8 308.53,1917.8 2195.53,1934.8 2265.53,1934.8 2645,1937.4 2602.5,1938.3 45.53,1939.8 2397.37,1941.44 2477.37,1941.44 2542.7,1941.5 2737.37,1941.44 2797.37,1941.44 2688.6,1965 4240.53,1964.8 4300.53,1964.8 1993.95,1967.87 2600.8,1972.3 2643.7,1972.3 1920.53,1974.8 45.53,1999.8 100.53,1999.8 170.53,1999.8 230.53,1999.8 310.53,1999.8 370.53,1999.8 445.53,1999.8 505.53,1999.8 2526.27,2000.13 2450.48,2003.49 2742.27,2003.13 2802.27,2003.13 2598.8,2014.5 2648.3,2014.2 4165.53,2014.8 4225.53,2014.8 2688,2019.5 1920.53,2024.8 1990.53,2024.8 2060.53,2024.8 2120.53,2024.8 2180.53,2024.8 2250.53,2024.8 610.53,2029.8 2335.53,2029.8 4520.53,2034.8 4620.53,2034.8 4690.53,2034.8 4775.53,2034.8 4845.53,2034.8 4412.87,2037.34 2601.9,2051.8 2456.27,2053.13 2516.27,2053.13 2645,2052.8 2786.27,2053.13 2832.58,2054.8 2395.58,2055.8 2719.7,2056.5 1571.5,2066.1 105.53,2074.8 175.53,2074.8 235.53,2074.8 315.53,2074.8 375.53,2074.8 450.53,2074.8 510.53,2074.8 2334.6,2077.85 1920.53,2079.8 1990.53,2079.8 2060.53,2079.8 2120.53,2079.8 2180.53,2079.8 45.53,2089.8 4795.53,2094.8 4865.53,2094.8 4930.53,2094.8 5000.53,2094.8 5085.53,2094.8 5155.53,2094.8 2547.53,2130.8 2704.53,2131.8 2335.53,2134.8 2397.37,2141.44 2797.37,2141.44 2493.58,2141.8 2741.58,2141.8 45.53,2149.8 105.53,2149.8 175.53,2149.8 235.53,2149.8 315.53,2149.8 375.53,2149.8 450.53,2149.8 510.53,2149.8 565.53,2149.8 1570.5,2152.1 1920.53,2154.8 1990.53,2154.8 2060.53,2154.8 2120.53,2154.8 2180.53,2154.8 2250.53,2154.8 2334.64,2182.85 2472.27,2186.13 2396.48,2189.49 2741.27,2191.13 2801.27,2191.13 2693.5,2196.1 2563.5,2201.1 2645.2,2208.2 1920.53,2209.8 1990.53,2209.8 2060.53,2209.8 2120.53,2209.8 2180.53,2209.8 2250.53,2209.8 2310.53,2209.8 1571.5,2222.1 45.53,2229.8 105.53,2229.8 175.53,2229.8 235.53,2229.8 315.53,2229.8 375.53,2229.8 450.53,2229.8 510.53,2229.8 565.53,2229.8 4795.53,2229.8 4865.53,2229.8 4930.53,2229.8 5000.53,2229.8 5085.53,2229.8 5155.53,2229.8 2738.27,2244.13 2798.27,2244.13 2501.27,2247.13 2647.5,2249.4 2425.48,2250.49 1919.64,2257.85 1989.64,2257.85 2059.64,2257.85 2119.64,2257.85 2179.64,2257.85 2249.64,2257.85 2309.64,2257.85 2602.57,2270.61 4865.53,2284.8 4925.53,2284.8 5000.53,2284.8 5080.53,2284.8 45.53,2289.8 4523.5,2297.1 2769.5,2298.1 2831.5,2298.1 3219.5,2298.1 3427.5,2298.1 3618.5,2298.1 3818.8,2298 3929.5,2298.1 4022.5,2298.1 4120.5,2298.1 4426.5,2298.1 1627.5,2299.1 1687.5,2299.1 1752.5,2299.1 1830.5,2299.1 1892.5,2299.1 1952.5,2299.1 2032.5,2299.1 2092.5,2299.1 2150.5,2299.1 2211.5,2299.1 2280.5,2299.1 2339.5,2299.1 2418.5,2299.1 2495.1,2299.2 2891.5,2299.1 2952.5,2299.1 3009.5,2299.1 3068.5,2299.1 3321.5,2299.1 3520.5,2299.1 3719.8,2299 4220.5,2299.1 4319.5,2299.1 1570.5,2300.1 2558.1,2299.7 2644.9,2299.8 2703.1,2299.7 4642.5,2300.1 5160.53,2299.8 3129.25,2300.71 105.53,2319.8 175.53,2319.8 235.53,2319.8 315.53,2319.8 375.53,2319.8 450.53,2319.8 510.53,2319.8 565.53,2319.8 4865.53,2354.8 4925.53,2354.8 5000.53,2354.8 5080.53,2354.8 4739.87,2357.34 45.53,2369.8 5160.53,2369.8 4646.5,2371.1 373.61,2393.87 448.61,2393.87 508.61,2393.87 563.61,2393.87 5160.53,2414.8 45.53,2429.8 4646.5,2431.1 5160.53,2484.8 373.61,2488.87 448.61,2488.87 508.61,2488.87 563.61,2488.87 4646.5,2496.1 4840.53,2495.8 45.53,2504.8 5160.53,2549.8 4646.5,2556.1 45.53,2564.8 373.61,2578.87 448.61,2578.87 508.61,2578.87 563.61,2578.87 4740.53,2604.8 4800.53,2604.8 4646.5,2608.1 5160.53,2619.8 45.53,2654.8 105.53,2654.8 175.53,2654.8 235.53,2654.8 315.53,2654.8 375.53,2654.8 450.53,2654.8 510.53,2654.8 565.53,2654.8 4646.5,2672.1 4730.5,2672.1 4800.5,2672.1 4890.5,2672.1 4960.5,2672.1 5045.5,2672.1 5115.5,2672.1
  other v2: 2290.36,871.79 2268.36,933.79 2764.58,1018.8 3530.53,1084.8 3565.48,1101.2 3418.58,1125.8 2114.53,1294.8 3295.26,1417.26 2794.79,1492.31 3413.37,1496 2684,1563 2795.2,1569.5 2550.29,1574.22 3374,1574.74 2630.2,1600.38 2556.29,1602.22 2791.6,1618.9 2640.29,1646.22 2537.29,1649.22 2568.6,1650.2 2791.5,1650.2 2567.2,1678.6 2750,1680 2638.29,1683.22 2664.4,1686.61 2544.29,1689.22 2380.7,1690.4 2670.2,1712.7 2538.29,1714.22 2567,1715.4 2603.4,1715.2 2637.29,1715.22 2834,1715 2567.6,1738.4 2603,1739.8 2605.6,1763.8 2568.8,1765 2515,1829.5 2569.6,1829.8 2695.8,1830.3 2641.5,1832.3 2745.2,1832 2789.4,1832.6 2601.23,1835.37 2567.29,2061.22 2680.29,2061.22 2622.29,2133.22 2662.29,2133.22 2586.29,2137.22
  other v3: 2384.58,668.8 2414.58,668.8 2444.58,668.8 2474.58,668.8 2504.58,668.8 1264.07,688.98 2384.58,693.8 2414.58,693.8 2444.58,693.8 2474.58,693.8 2504.58,693.8 1024.24,708.35 2385.26,719.05 2415.26,719.05 2445.26,719.05 2475.26,719.05 1162.04,747.72 1201.41,747.72 2385.26,749.05 2415.26,749.05 2445.26,749.05 2475.26,749.05 2505.26,749.05 1181.72,767.41 2384.58,783.8 2414.58,783.8 2474.58,783.8 2504.58,783.8 1162.04,905.2 1339.2,905.2 1013.58,1150.8 1043.58,1150.8 1068.58,1150.8 1013.58,1180.8 1043.58,1180.8 1068.58,1180.8 1383.58,1200.8 1408.58,1200.8 1433.58,1200.8 1013.58,1205.8 1043.58,1205.8 1068.58,1205.8 1383.58,1225.8 1408.58,1225.8 1433.58,1225.8 1013.58,1235.8 1043.58,1235.8 1068.58,1235.8 1383.58,1250.8 1408.58,1250.8 1433.58,1250.8 1383.58,1275.8 1408.58,1275.8 1433.58,1275.8 1123.58,1550.8 1148.58,1550.8 1203.58,1550.8 1123.58,1575.8 1148.58,1575.8 1173.58,1575.8 1203.58,1575.8 1123.58,1610.8 1148.58,1610.8 1173.58,1610.8 1203.58,1610.8 1123.58,1640.8 1148.58,1640.8 1173.58,1640.8 1203.58,1640.8 3295.24,1785.14 3413.35,1863.88 3373.98,1942.62
  other v4: 2426.84,1298.95 2643.37,1515.48
  other v6: 4961,473 4924,495 4996,495 4960,517
HEADP_L: C58.1 FB11.2 J7.2 | length 693.2
  Top Layer w10: J7.2@1211.3,2208.9 1211.3,2078.07 1387.58,1901.8 C58.1@1387.58,1648.8 ; FB11.2@1353.28,1676.8 1353.31,1658.06 1365.58,1645.8 C58.1@1389.58,1645.8
HEADP_R: C58.2 FB10.2 J7.3 | length 988.6
  Top Layer w5: J7.3@1481.53,2479.13 J7.3@1502.7,2500.3
  Top Layer w10: FB10.2@1354.28,1598.8 1354.31,1602.59 1358.31,1606.59 1362.11,1606.59 1365.06,1609.55 1386.05,1609.55 1395.78,1619.29 1414.67,1619.29 1420.53,1625.14 1420.53,1905.25 1481.53,1966.25 J7.3@1481.53,2479.13
HFXO_N: TP19.1 U3.A2 Y1.3 | length 284.4
  Top Layer w3: U3.A2@2663.06,1515.48 2690.58,1543 v2(2831,1543) ; v2@2831,1542 2832,1543 2859,1543 2893.11,1508.89 Y1.3@2893.11,1480.48
HFXO_N_J: TP53.1 U22.A3 Y4.3 | length 437.3
  Top Layer w5: U22.A3@1358.89,885.52 1382.25,885.52 1396.53,899.8 v2(1456.81,899.8) ; v2@1457.53,898.8 1456.81,898.07 1456.81,879.07 1446.53,868.8 1446.53,795.8 1499.53,742.8 1506.53,742.8 1517.53,753.8 1569.81,753.8 1587.81,735.8 Y4.3@1591.53,735.8
  Bottom Layer w5: TP53.1@1422.53,872.8 1448.19,898.46 1457.87,898.46 v2@1458.53,897.8
HFXO_P: U3.A3 Y1.1 | length 197.4
  Top Layer w3: U3.A3@2663.06,1495.8 2750.53,1495.8 2803.53,1442.8 Y1.1@2838.53,1442.8
HFXO_P_J: U22.A4 Y4.1 | length 295.9
  Top Layer w5: U22.A4@1358.89,865.83 1398.25,865.83 1438.53,825.55 1438.53,783.8 1512.53,709.8 1512.53,699.8 1522.53,689.8 Y4.1@1551.53,689.8
I2C_FB_SCL: J17.4 Q5.2 R83.1 S15.1 U9.2 | length 5773.1
  Top Layer w5: v2@1125.58,1487.8 1125.58,1488.69 1128.63,1491.75 U9.2@1128.63,1517.26 ; R83.1@3951.89,550.8 3951.89,548.83 3972.24,528.48 3972.24,522.14 v2@3972.58,521.8
  Layer 5 w5: v2(1121.58,443.8) 1123.47,443.8 1130.97,451.3 2647.83,451.3 2648.33,451.8 2806.58,451.8 2825.58,432.8 2855.58,432.8 2864.58,423.8 3816.58,423.8 3915.58,522.8 v2(3973.58,522.8) 4024.58,471.8 v2(4122.58,471.8)
  Layer 4 w5: v2(4122.58,471.8) 4123.13,472.34 4136.08,472.34 4259.53,595.8 4340.6,595.8 4405.53,660.73 4405.53,901.8 4328.53,978.8 4328.53,1179.8 v4(4329.53,1180.8)
  Layer 6 w5: v2(1121.58,443.8) 1143.53,465.75 1143.53,488.53 1154.03,499.03 1154.03,611.3 1104.53,660.8 1104.53,716.16 1096.03,724.66 1096.03,734.19 1104.53,742.69 1104.53,844.8 1128.53,868.8 1128.53,1044.53 1129.03,1045.03 1129.03,1051.4 1149.32,1071.68 1149.32,1112.37 1135.58,1126.11 1135.58,1346.8 1117.62,1364.75 1117.62,1420.85 1126.22,1429.45 v2(1126.22,1487.44)
  Bottom Layer w5: S15.1@3947.63,500 3951.84,495.8 3970.58,495.8 3973.58,498.8 v2(3973.58,522.8) ; v2(4122.58,471.8) 4123.92,470.46 4123.92,458.46 4148.58,433.8 4281.58,433.8 4286.06,438.28 J17.4@4286.06,462 ; v4(4329.53,1180.8) 4456.53,1180.8 4466.36,1190.62 Q5.2@4654,1190.62
I2C_FB_SDA: J17.5 Q4.2 R84.1 S14.1 U9.3 | length 6235
  Top Layer w5: U9.3@1144.38,1517.26 1144.38,1489.99 v2@1146.58,1487.8 ; R84.1@4074.69,550 4074.69,548.03 4094.93,527.8 4094.93,514.61 v2(4095.24,514.3)
  Layer 5 w5: v2(1145.22,1487.44) 1486.22,1487.44 1537.22,1538.44 v2(1666.22,1538.44) 1667.93,1538.44 v2@1668.58,1537.8 ; v2@1758.58,283.8 1772.58,297.8 2642.58,297.8 2648.58,291.8 2878.58,291.8 2896.58,309.8 3773.58,309.8 v2(3818.22,354.44) ; v2@3852.58,429.8 3853.58,430.8 3861.58,430.8 3886.58,455.8 3950.58,455.8 3959.58,446.8 4127.58,446.8 4142.58,461.8 4142.58,481.8 4110.08,514.3 v2(4095.24,514.3)
  Layer 4 w5: v2@1666.58,1538.8 1679.03,1526.34 1679.03,879.25 1675.62,875.84 1675.62,822.34 1679.58,818.38 1679.58,772.8 ; 1678.53,772.8 1678.53,756.53 1638.05,716.05 1629.86,716.05 1629.82,716.09 1598.82,716.09 1572.53,689.8 1572.53,443.84 1706.58,309.8 1731.87,309.8 v2(1758.22,283.44) ; v2(4095.24,514.3) 4200.74,619.8 4319.53,619.8 4388.53,688.8 4388.53,887.8 4313.53,962.8 4313.53,1306.8 v4(4317.53,1310.8)
  Layer 6 w5: v2@3818.58,354.8 3818.58,395.8 v2(3852.22,429.44)
  Bottom Layer w5: S14.1@4071.53,492 4071.74,491.8 4093.65,491.8 4096.58,494.73 ; v2(4095.24,514.3) 4096.58,512.96 4096.58,494.73 ; J17.5@4305.74,462 4305.74,431.96 4290.58,416.8 4113.58,416.8 4096.58,433.8 4096.58,494.73 ; v4(4317.53,1310.8) 4394.53,1310.8 4407.39,1297.94 Q4.2@4551.43,1297.94
I2S_COD_SCLK: R81.2 S10.1 U9.29 | length 1181.6
  Top Layer w5: v2(1028.58,1589.8) 1030.25,1588.13 U9.29@1089.26,1588.13 ; R81.2@1517.34,1663.7 1548.04,1663.7 1552.91,1668.57 v2(1554.81,1668.57)
  Bottom Layer w5: v2@1029.58,1589.8 1057.58,1589.8 1065.58,1581.8 1086.58,1581.8 1105.58,1562.8 1460.58,1562.8 1560.58,1662.8 ; v2(1554.81,1668.57) 1560.58,1662.8 ; S10.1@2027.68,1714.04 1914.33,1714.04 1913.58,1714.8 1612.58,1714.8 1560.58,1662.8
I2S_COD_WS: R82.2 S11.1 U9.30 | length 1150
  Top Layer w5: v2(1047.58,1571.8) 1048.16,1572.38 U9.30@1089.26,1572.38 ; R82.2@1519,1591.37 1555,1591.37 v2(1555.58,1590.8)
  Bottom Layer w5: v2@1048.58,1572.8 1048.92,1572.46 1048.92,1558.46 1100.58,1506.8 1471.58,1506.8 v2(1555.58,1590.8) 1775.58,1590.8 1825.82,1641.04 S11.1@2028.68,1641.04
I3C_SCL: R77.1 S8.1 U12.13 U15.13 | length 1173.1
  Top Layer w5: U15.13@3457.03,1141 3520.53,1141 ; 3520.53,1140.8 3558.53,1140.8 3591.08,1173.34 3591.08,1270.8 3590.56,1271.32 3590.56,1368.77 3639.58,1417.8 v2@3664.58,1417.8 ; U12.13@3746.5,1581.8 3778.58,1581.8 v2(3790.22,1593.44) 3790.58,1593.8 3790.58,1639.8 3774.58,1655.8 3774.58,1685.11 R77.1@3772.89,1686.8
  Layer 4 w5: v2(3664.22,1417.44) 3676.58,1429.8 3676.58,1528.24 3680.97,1532.63 3736.71,1532.63 3746.5,1542.43 3746.5,1570.72 3768.58,1592.8 3789.58,1592.8 v2(3790.22,1593.44)
  Bottom Layer w5: v2(3483.22,1141.44) 3483.22,1054.15 3624.28,913.1 S8.1@3624.28,886.8
I3C_SDA: R78.1 S9.1 U12.14 U15.14 | length 1296.2
  Top Layer w5: U15.14@3457.03,1160.69 v2@3506.22,1160.69 ; v2(3506.22,1160.44) 3542.18,1160.44 3566.53,1184.8 3566.53,1204.8 3574.53,1212.8 3574.53,1377.8 3589.53,1392.8 ; 3590.06,1392.27 3644.22,1446.44 v2(3663.22,1446.44) ; U12.14@3746.5,1601.48 3765.26,1601.48 v2(3776.22,1612.44) ; v3(3767.53,1440.8) 3824.85,1440.8 R78.1@3827.53,1438.11
  Layer 5 w5: v2(3663.22,1446.44) 3684.3,1446.44 3685.8,1447.94 3760.39,1447.94 v3(3767.53,1440.8)
  Layer 4 w5: v2(3663.22,1446.44) 3663.22,1603.24 3682.71,1622.73 3766.65,1622.73 v2@3776.22,1613.15 ; v2(3776.22,1612.44) v2@3776.22,1613.15 ; v2@3776.58,1612.8 v2@3776.22,1613.15
  Bottom Layer w5: v2(3506.22,1160.44) 3506.22,1049 3612.43,942.8 3648.13,942.8 3700.58,890.35 3700.58,889.82 3703.28,887.12 S9.1@3703.28,885.8
IMU_2: U12.2 U15.2 | length 686.3
  Top Layer w5: U15.2@3430.85,1186.87 3430.85,1221.56 3489.08,1279.8 3507.34,1279.8 v3(3536.12,1308.57) 3536.34,1308.8 v3@3536.53,1308.8 ; v2(3714.53,1652.8) 3714.53,1650.9 3720.42,1645.01 U12.2@3720.42,1627.56
  Layer 5 w5: v3@3536.53,1308.62 3625.76,1308.62 v2@3626.58,1307.8
  Layer 4 w5: v2(3626.22,1307.44) 3626.22,1581.13 3697.89,1652.8 v2(3714.53,1652.8)
IMU_3: U12.3 U15.3 | length 712.6
  Top Layer w5: U15.3@3411.16,1186.87 3410.58,1187.45 3410.58,1225.3 3589.58,1404.3 3589.58,1417.8 3576.58,1430.8 3576.58,1655.8 3590.58,1669.8 3686.58,1669.8 3700.74,1655.64 U12.3@3700.74,1627.56
IMU_10: U12.10 U15.10 | length 949.1
  Top Layer w5: U15.10@3430.85,1095.14 3430.85,1068.53 v2@3432.58,1066.8 ; v2@3718.58,1507.8 3720.42,1509.64 U12.10@3720.42,1536.03
  Layer 5 w5: v2(3432.22,1066.44) 3821.22,1066.44 3824.58,1069.8 v2(3824.58,1080.8)
  Layer 4 w5: v2(3718.22,1507.44) 3790.58,1435.09 3790.58,1088.09 3797.87,1080.8 v2(3824.58,1080.8)
IMU_11: U12.11 U15.11 | length 666.7
  Top Layer w5: U15.11@3450.53,1095.14 3450.53,1098.14 3454.92,1102.53 3500.31,1102.53 3507.58,1109.8 3553.58,1109.8 3609.53,1165.75 3609.53,1352.75 3630.58,1373.8 3675.58,1373.8 3681.58,1379.8 3681.58,1441.8 3690.58,1450.8 3707.58,1450.8 3708.58,1449.8 3732.58,1449.8 3740.58,1457.8 U12.11@3740.58,1535.8
IMU_CS: R49.1 U12.12 U15.12 | length 752.6
  Top Layer w5: U15.12@3457.03,1121.32 3553.79,1121.32 3599.53,1167.06 3599.53,1366.44 3624.89,1391.8 v2@3665.58,1391.8 ; U12.12@3746.5,1562.11 3790.58,1562.11 R49.1@3790.89,1561.8 3792.22,1560.47 3792.22,1532.15 v2@3792.58,1531.8
  Layer 4 w5: v2(3665.22,1391.44) 3687.58,1413.8 3687.58,1506.8 3703.58,1522.8 3783.58,1522.8 v2(3792.22,1531.44) v2@3792.58,1531.8
IMU_INT2: TP33.1 U12.9 U15.9 | length 1094.5
  Top Layer w5: v2@3405.58,1065.8 3411.16,1071.38 U15.9@3411.16,1095.14 ; v2@3699.58,1491.8 3700.74,1492.95 U12.9@3700.74,1536.03
  Layer 5 w5: v2(3409.22,1068.44) 3426.87,1050.8 3815.58,1050.8 v2@3823.58,1042.8
  Layer 4 w5: v2@3699.98,1488.8 3700.56,1488.21 3700.56,1487.81 3781.58,1406.8 3781.58,1084.09 v2(3823.22,1042.44)
  Bottom Layer w5: TP33.1@3613.58,1515.8 3623.58,1515.8 3647.93,1491.44 v2(3699.22,1491.44)
JLinkCTS: TP59.1 U22.E8 | length 193.2
  Layer 5 w5: v3(1280.15,787.09) 1299.83,767.41 1361.92,767.41 v3(1404.53,724.8)
  Bottom Layer w20: v3(1404.53,724.8) 1404.53,708.5 1421.53,691.5 TP59.1@1421.53,688.8
JLinkRTS: TP58.1 U22.B10 | length 122.1
  Layer 3 w5: v3(1339.2,747.72) 1422.46,747.72 v3(1422.96,748.22)
  Bottom Layer w20: v3(1422.96,748.22) 1424.38,746.8 TP58.1@1460.53,746.8
LED0_B_J: Q8.1 R98.2 U22.F19 | length 2357.7
  Top Layer w5: v1(1942.53,1049.8) 1982.53,1089.8 2156.95,1089.8 2252.95,993.8 2410.58,993.8 2438.58,965.8 2553.33,965.8 2584.83,934.3 2596.34,934.3 2618.84,956.8 2685.53,956.8 v2(2699.53,942.8)
  Layer 5 w5: v2(1299.53,966.3) 1322.03,966.3 1456.53,1100.8 1617.53,1100.8 1783.53,934.8 1937.53,934.8 1952.53,949.8 1952.53,1039.8 v1(1942.53,1049.8)
  Layer 4 w5: v3(1260.46,570.56) 1260.46,609.06 1301.58,650.18 1301.58,705.75 1280.15,727.18 1280.15,751.41 1298.03,769.3 1298.03,959.87 1298.19,960.03 1298.19,964.96 v2(1299.53,966.3)
  Bottom Layer w5: v2(2699.53,942.8) 2699.53,944.43 2706.32,951.22 Q8.1@2706.32,975.58 ; Q8.1@2708.58,962.36 2709.72,961.22 2719.94,961.22 2730.36,950.8 2775.06,950.8 2799.32,975.06 R98.2@2799.32,1021
LED0_G_J: Q7.1 R97.2 U22.T1 | length 1885
  Top Layer w5: U22.T1@1063.61,924.89 1063.61,946.88 1072.53,955.8 v2(1087.53,955.8) ; v2(1851.53,1106.8) 1863.53,1094.8 1897.27,1094.8 1900.27,1097.8 2160.27,1097.8 2256.27,1001.8 2420.83,1001.8 2441.83,980.8 2556.58,980.8 v2(2591.58,945.8)
  Layer 5 w5: v2(1087.53,955.8) 1121.03,989.3 1327.53,989.3 ; 1327.53,989.8 1451.03,1113.3 1653.03,1113.3 1659.53,1106.8 v2(1851.53,1106.8)
  Bottom Layer w5: v2(2591.58,945.8) 2592.92,947.14 2592.92,955.22 2601.75,964.06 Q7.1@2602.32,964.06 ; Q7.1@2602.32,975.58 Q7.1@2602.32,964.06 ; R97.2@2696.32,1021 2689.58,1014.26 2689.58,960.8 2679.58,950.8 2632.58,950.8 2622.16,961.22 2605.16,961.22 Q7.1@2602.32,964.06
LED0_R_J: Q6.1 R95.2 U22.D18 | length 2007.5
  Top Layer w5: v5(1875.53,1108.3) 2161.08,1108.3 2211.58,1057.8 v2(2355.58,1057.8)
  Layer 3 w5: v3(1299.83,590.24) 1299.83,690.1 1316.53,706.8 v3(1316.53,785.8)
  Layer 5 w5: v2(1307.58,1000.8) 1308.13,1001.34 1321.08,1001.34 1441.03,1121.3 1862.53,1121.3 1874.53,1109.3 v5@1874.53,1108.8
  Layer 4 w5: v2(1307.58,1000.8) 1359.58,948.8 1369.41,948.8 1378.53,939.67 1378.53,837.8 1325.53,784.8 1317.53,784.8 v3(1316.53,785.8)
  Bottom Layer w5: v2(2355.58,1057.8) 2337.53,1039.75 2337.53,994.8 2358.75,973.58 Q6.1@2497.32,973.58 ; Q6.1@2496.58,966.8 2496.58,963.36 2500.72,959.22 2514.16,959.22 2524.58,948.8 2565.58,948.8 2581.58,964.8 2581.58,1009.8 2581.99,1009.8 2590.32,1018.12 R95.2@2590.32,1020
LFXO_N: R87.2 TP23.1 U3.M9 Y2.1 | length 596.1
  Top Layer w3: R87.2@2189.69,1516 2189.69,1550.91 v2(2207.58,1568.8)
  Bottom Layer w3: v2@2208.58,1568.8 2208.58,1569.8 2221.07,1582.29 2240.29,1582.29 TP23.1@2243,1585 ; Y2.1@2223.53,1367.8 2223.53,1397.8 2227.53,1401.8 2255.58,1401.8 2288.58,1434.8 2288.58,1447.8 ; TP23.1@2247.58,1583.8 2247.58,1580.43 2288.58,1539.43 2288.58,1447.8 ; v4(2446.52,1377.69) 2426.84,1397.37 2426.84,1419.39 2422.58,1423.65 2422.58,1435.8 2399.58,1458.8 2333.58,1458.8 2320.58,1445.8 2290.58,1445.8 2288.58,1447.8
LFXO_N_J: U22.V17 Y5.1 | length 148.7
  Layer 5 w5: v2(972.53,669.8) 1017.61,669.8 1024.24,663.16 v3(1024.24,609.93)
  Bottom Layer w5: Y5.1@938.53,686.8 955.53,669.8 v2(972.53,669.8)
LFXO_P: U3.N9 Y2.2 | length 358
  Top Layer w3: v5(2410.58,1384.8) 2419.73,1384.8 U3.N9@2426.84,1377.69
  Layer 5 w3: v2(2268.08,1267.8) 2268.08,1301.71 2277.03,1310.67 2277.03,1343.1 2269.53,1350.6 2269.53,1383.04 2271.29,1384.8 v5(2410.58,1384.8)
  Bottom Layer w3: Y2.2@2223.53,1239.8 2264.53,1239.8 2268.08,1243.34 v2(2268.08,1267.8) ; Y2.2@2238.08,1237.8 Y2.2@2242.53,1237.8
LFXO_P_J: R87.1 U22.W17 Y5.2 | length 2198
  Top Layer w5: v2(1064.53,1379.3) 1075.03,1368.8 1272.58,1368.8 1329.58,1425.8 1617.58,1425.8 1691.58,1499.8 2062.32,1499.8 2063.82,1501.3 2135.61,1501.3 2140.02,1505.71 2141.99,1505.71 2150.32,1514.03 R87.1@2150.32,1516
  Layer 5 w5: v2(867.53,654.8) 958.7,654.8 1003.57,609.93 v3(1004.56,609.93)
  Layer 6 w5: v3(1004.56,609.93) 1004.56,649.3 1044.53,689.27 1044.53,982.8 1091.58,1029.84 1091.58,1247.8 1064.53,1274.84 v2(1064.53,1379.3)
  Bottom Layer w5: Y5.2@810.53,686.8 810.53,681.3 831.03,660.8 859.64,660.8 865.64,654.8 v2(867.53,654.8)
LINE_IN_L: C69.2 C71.1 R40.1 U9.26 | length 240.4
  Top Layer w5: v2(882.58,1635.8) 883.1,1636.32 R40.1@968,1636.32 ; R40.1@970.58,1636.8 972,1635.37 U9.26@1089.26,1635.37
  Bottom Layer w5: v2@881.58,1637.8 883.58,1635.8 915.52,1635.8 C71.1@916,1636.29